# EAGLE board under (EAGLE 9.5.1)

Size 65 x 101.99 mm. Coordinates in mm from the lower left corner, seen from the top.
Outline: 39,6.62 39,2 arc-90 36.99,0 28,0.02 arc-90 26,2.02 26,6.62 arc90 24,8.62 20.5,8.62 arc-90 18.5,10.62 18.5,22.09 arc79 16.88,24.05 4.04,26.57 arc-79 0,31.55 0,50.93 4,50.93 arc-90 5,49.93 5,46.93 7.5,46.93 7.5,53.93 0,53.93 0,78.38 arc-80 4.13,83.31 24.35,86.88 arc80 26,88.85 26,99.99 arc-90 28,101.99 37,101.99 arc-90 39,99.99 39,88.85 arc80 40.65,86.88 60.88,83.31 arc-80 65,78.39 65,53.93 57.5,53.93 57.5,46.93 60,46.93 60,49.93 arc-90 61,50.93 65,50.93 65,31.48 arc-79 61,26.57 48.12,24.05 arc79 46.5,22.09 46.5,10.62 arc-90 44.5,8.62 41,8.62 arc90 39,6.62
Outline: 28.5,51.93 15.5,51.93 arc-90 14.5,52.93 14.5,80.13 arc-90 15.5,81.13 28.5,81.13 arc-90 29.5,80.13 29.5,52.93 arc-90 28.5,51.93
Copper layers (1*16): Top 0.035mm / dielectric 1.5mm / Bottom 0.035mm
Design rules "default": minimum track width 6mil, minimum drill 0.35mm, track to track 6mil, track to pad 6mil, pad to pad 6mil, via to via 6mil, smd to smd 6mil, copper to edge 40mil, drill to drill 6mil, minimum pad ring 10mil, minimum via ring 8mil, stop-mask expansion 4mil, vias tented up to drill 0mil, thermal gap 10mil
Holes 4 mm at 32.5,80.93
Holes 2.7 mm at 36.5,96.99 36.5,92.98 28.5,92.98 28.5,96.99 36.5,10.63 36.5,6.63 28.5,6.63 28.5,10.63 3.5,78.43 3.7,29.43 61.5,78.43 61.3,29.43

## Placement (x,y rotation side)
E$1  [LOGO_FABO_MS]  32.5,36.15 180 top

## Library data of the parts
E$1 = FaBo-Logo

## Text on the board
tPlace: Rev 1.0.4 | #1204